# Altium PCB PCB - Rectangular Longer.PcbDoc (part 2 of 2)
Units mm, origin at the board's own origin, x right, y up, seen from the top; angles counter-clockwise.
Board outline 30 x 80 mm, 6 copper layers (Top Layer, Layer 1, Layer 3, Layer 4, Layer 2, Bottom Layer), stack 1.211 mm thick; 158 components, 103 nets, 435 pads, 0 vias.
Unrouted connection lines stored in the file: 282.
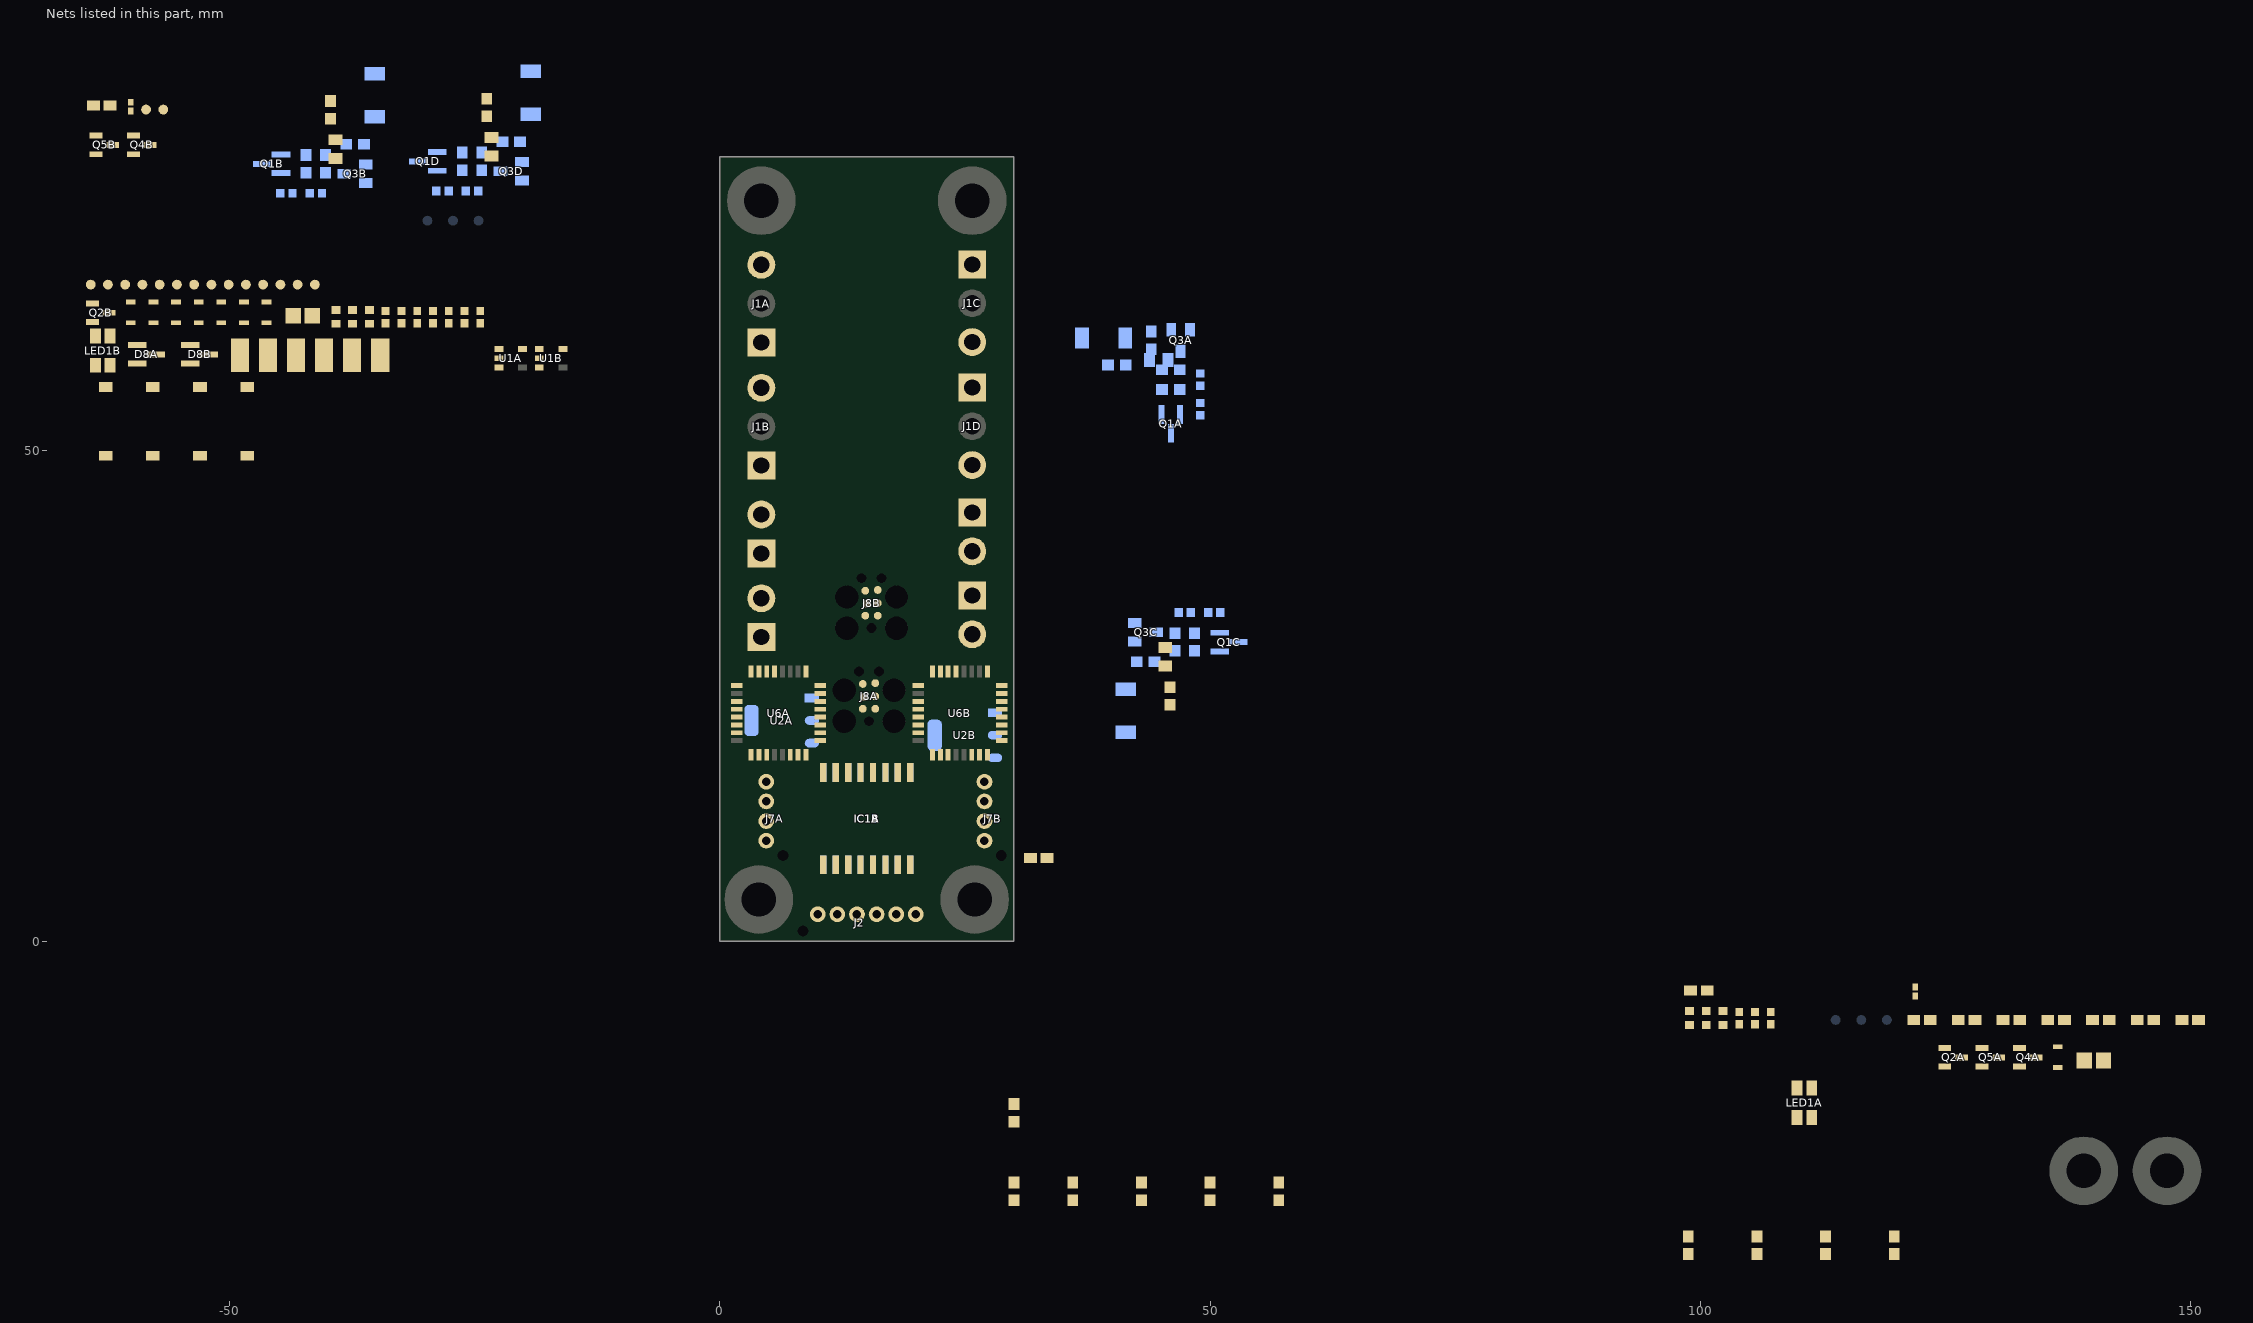
[diagram p2: the nets of this part, all layers, seen from the top]

## Nets (pads, with @x,y where several pads share a name; then routed paths per layer and width w, separated by ;. In a path a pad name is that pad's centre, name@x,y a point inside that pad or via, vN(x,y) a via of type N, cw(c..) or ccw(c..) an arc to the next point about the centre after c; other vN are vias at no path point)
3V3A: C1A.1 C3A.1 C4A.1 C7A.1 C9A.1 C10A.1 C11A.1 IC1A.1 IC1A.5 J7A.1 J8A.1 LED1A.1 R8A.2 R9A.2 R37A.2 U1A.5 U2A.3 U6A.1 U6A.5 U6A.17
3V3B: C1B.1 C3B.1 C4B.1 C7B.1 C9B.1 C10B.1 C11B.1 IC1B.1 IC1B.5 J7B.1 J8B.1 LED1B.1 R8B.2 R9B.2 R37B.2 U1B.5 U2B.3 U6B.1 U6B.5 U6B.17
BOOT0A: R9A.1 SW1A.2 U6A.31
BOOT0B: R9B.1 SW1B.2 U6B.31
GNDA: C1A.2 C1B.2 C2A.2 C2B.2 C3A.2 C3B.2 C4A.2 C4B.2 C7A.2 C7B.2 C8A.2 C8B.2 C9A.2 C9B.2 C10A.2 C10B.2 C11A.2 C11B.2 IC1A.2 IC1A.4 IC1A.7 IC1A.8 IC1B.2 IC1B.4 IC1B.7 IC1B.8 J1A.3 J1B.3 J1C.3 J1D.3 J3A.2 J3B.2 J3C.2 J3D.2 J7A.4 J7B.4 J8A.5 J8B.5 LED2A.1 LED2B.1 LED2C.1 LED2D.1 Q2A.2 Q2B.2 Q3A.2 Q3B.2 Q3C.2 Q3D.2 Q4A.2 Q4B.2 Q5A.2 Q5B.2 R3A.1 R3B.1 R3C.1 R3D.1 R7A.1 R7B.1 R7C.1 R7D.1 R16A.1 R16B.1 R17A.1 R17B.1 R18A.1 R18B.1 SW1A.1 SW1B.1 SW2A.1 SW2B.1 TP1A.1 TP1B.1 TP2A.1 TP2B.1 TP3A.1 TP3B.1 U1A.2 U1B.2 U2A.2 U2A.4 U2B.2 U2B.4 U6A.16 U6A.32 U6B.16 U6B.32
ISO_5VA: C5A.1 C5B.1 C6A.1 C6B.1 IC1A.16 IC1B.16 J2.1
ISO_GNDA: C5A.2 C5B.2 C6A.2 C6B.2 IC1A.9 IC1A.10 IC1A.15 IC1B.9 IC1B.10 IC1B.15 J2.6
LED_BLUEA: Q2A.1 R16A.2 U6A.18
LED_BLUEB: Q2B.1 R16B.2 U6B.18
LED_REDA: Q5A.1 R18A.2 U6A.3
LED_REDB: Q5B.1 R18B.2 U6B.3
LPUART1_RXA: SB2A.1 U6A.9
LPUART1_RXB: SB2B.1 U6B.9
LPUART1_TXA: SB3A.1 U6A.7
LPUART1_TXB: SB3B.1 U6B.7
NetC2A_1: C2A.1 D8A.3 U2A.1
NetC2B_1: C2B.1 D8B.3 U2B.1
NetC8A_1: C8A.1 SW2A.2 U1A.3
NetC8B_1: C8B.1 SW2B.2 U1B.3
NetD1A_1: D1A.1 J1A.1
NetD1B_1: D1B.1 J1B.1
NetD1C_1: D1C.1 J1C.1
NetD1D_1: D1D.1 J1D.1
NetIC1A_3: IC1A.3 SB2A.2
NetIC1A_6: IC1A.6 SB3A.2
NetIC1A_11: IC1A.11 IC1B.11 J2.5
NetIC1A_12: IC1A.12 IC1B.12 J2.4
NetIC1A_13: IC1A.13 IC1B.13 J2.3
NetIC1A_14: IC1A.14 IC1B.14 J2.2
NetIC1B_3: IC1B.3 SB2B.2
NetIC1B_6: IC1B.6 SB3B.2
NetJ3A_1: J3A.1 Q1A.3 R22A.2
NetJ3B_1: J3B.1 Q1B.3 R22B.2
NetJ3C_1: J3C.1 Q1C.3 R22C.2
NetJ3D_1: J3D.1 Q1D.3 R22D.2
NetJ7A_2: J7A.2 SB1A.2
NetJ7A_3: J7A.3 R37A.1 SB4A.2
NetJ7B_2: J7B.2 SB1B.2
NetJ7B_3: J7B.3 R37B.1 SB4B.2
NetJ8A_3: J8A.3 TP10A.1
NetJ8A_6: J8A.6 TP11A.1
NetJ8B_3: J8B.3 TP10B.1
NetJ8B_6: J8B.6 TP11B.1
NetLED1A_2: LED1A.2 R13A.2
NetLED1A_3: LED1A.3 R14A.2
NetLED1A_4: LED1A.4 R15A.2
NetLED1B_2: LED1B.2 R13B.2
NetLED1B_3: LED1B.3 R14B.2
NetLED1B_4: LED1B.4 R15B.2
NetLED2A_2: LED2A.2 R22A.1
NetLED2B_2: LED2B.2 R22B.1
NetLED2C_2: LED2C.2 R22C.1
NetLED2D_2: LED2D.2 R22D.1
NetQ1A_1: Q1A.1 R1A.2 R10A.2
NetQ1B_1: Q1B.1 R1B.2 R10B.2
NetQ1C_1: Q1C.1 R1C.2 R10C.2
NetQ1D_1: Q1D.1 R1D.2 R10D.2
NetQ2A_3: Q2A.3 R13A.1
NetQ2B_3: Q2B.3 R13B.1
NetQ3A_3: Q3A.3 R10A.1
NetQ3B_3: Q3B.3 R10B.1
NetQ3C_3: Q3C.3 R10C.1
NetQ3D_3: Q3D.3 R10D.1
NetQ4A_1: Q4A.1 R17A.2
NetQ4A_3: Q4A.3 R14A.1
NetQ4B_1: Q4B.1 R17B.2
NetQ4B_3: Q4B.3 R14B.1
NetQ5A_3: Q5A.3 R15A.1
NetQ5B_3: Q5B.3 R15B.1
NetTP4A_1: TP4A.1 U6A.6
NetTP4B_1: TP4B.1 U6B.6
NetTP5A_1: TP5A.1 U6A.29
NetTP5B_1: TP5B.1 U6B.29
NetTP6A_1: TP6A.1 U6A.30
NetTP6B_1: TP6B.1 U6B.30
NetTP7A_1: TP7A.1 U6A.21
NetTP7B_1: TP7B.1 U6B.21
NetTP8A_1: TP8A.1 U6A.22
NetTP8B_1: TP8B.1 U6B.22
NetTP9A_1: TP9A.1 U6A.25
NetTP9B_1: TP9B.1 U6B.25
NRSTA: R8A.1 U1A.1 U6A.4
NRSTB: R8B.1 U1B.1 U6B.4
PRIMARY_OUT_EN_1: Q3A.1 R3A.2 U6A.14
PRIMARY_OUT_EN_2: Q3B.1 R3B.2 U6A.15
PRIMARY_VBATT_1: D1A.2 D8A.1 Q1A.2 R1A.1 R6A.2
PRIMARY_VBATT_2: D1B.2 D8A.2 Q1B.2 R1B.1 R6B.2
PRIMARY_VBATT_SENSE_1: R6A.1 R7A.2 U6A.10
PRIMARY_VBATT_SENSE_2: R6B.1 R7B.2 U6A.11
SECONDARY_OUT_EN_1: Q3C.1 R3C.2 U6B.14
SECONDARY_OUT_EN_2: Q3D.1 R3D.2 U6B.15
SECONDARY_VBATT_1: D1C.2 D8B.1 Q1C.2 R1C.1 R6C.2
SECONDARY_VBATT_2: D1D.2 D8B.2 Q1D.2 R1D.1 R6D.2
SECONDARY_VBATT_SENSE_1: R6C.1 R7C.2 U6B.10
SECONDARY_VBATT_SENSE_2: R6D.1 R7D.2 U6B.11
SWCLKA: J8A.4 U6A.24
SWCLKB: J8B.4 U6B.24
SWDIOA: J8A.2 U6A.23
SWDIOB: J8B.2 U6B.23
USART2_RXA: SB4A.1 U6A.20
USART2_RXB: SB4B.1 U6B.20
USART2_TXA: SB1A.1 U6A.19
USART2_TXB: SB1B.1 U6B.19
pads on no net: FID1.0 FID2.0 FID3.0 FID4.0 FID5.0 FID6.0 H1.1 H2.1 H3.1 H4.1 H5.1 H6.1 J1A.2 J1B.2 J1C.2 J1D.2 J2.11 J7A.11 J7B.11 J8A.0 J8B.0 U1A.4 U1B.4 U6A.2 U6A.8 U6A.12 U6A.13 U6A.26 U6A.27 U6A.28 U6B.2 U6B.8 U6B.12 U6B.13 U6B.26 U6B.27 U6B.28

## Silkscreen, mask and mechanical layers (free items; w line width, h text height)
Board:
  the board outline again, w0.5
Top Assembly (Mech5):
  drawing of 71 lines, arcs and shapes, not listed
  text "1" at -251.917,172.192 h3.81
  text "2" at -194.692,172.192 h3.81
  text "3" at -139.241,172.192 h3.81
  text "7" at 102.968,172.192 h3.81
  text "8" at 161.08,172.192 h3.81
  text "9" at 218.305,172.192 h3.81
  text "6" at 43.276,171.952 h3.81
  text "5" at -14.795,171.821 h3.81
  text "10" at 274.643,171.749 h3.81
  text "4" at -74.918,171.305 h3.81
  text "A" at 309.492,146.2 h3.81
  text "A" at -278.414,146.152 h3.81
  text "B" at 309.492,94.775 h3.81
  text "B" at -278.414,94.727 h3.81
  text "C" at 309.802,44.588 h3.81
  text "C" at -278.104,44.54 h3.81
  text "ASSEMBLY DRAWING NOTES: /  / 1. THE PCB ASSEMBLY SHALL BE COMPLIANT WITH THE ROHS2 DIRECTIVE 2011/65/EU. THIS SHALL INCLUDE, AT A MINIMUM, ALL THE CONSTITUENT MATERIALS AND ANY OTHER ADDITIVES THAT MAY BE INCLUDED OR TRANSFERRED INTO THE FINAL PRODUCT DURING THE MANUFACTURING PROCESS. THE SUPPLIER OF THIS PCB ASSEMBLY SHALL BE ABLE TO PROVIDE DOCUMENTATION UPON REQUEST DEMONSTRATING COMPLIANCE TO THE DIRECTIVE. /       / 2. ASSEMBLY SHALL BE ACCEPTABLE AND REJECTABLE AND INSPECTED TO IPC-A-610, CLASS 2. /  / 3. REWORK, REPAIR, OR MODIFICATIONS MUST COMPLY WITH IPC-7711 AND IPC-7721 CLASS 2. /  / 4. EXCEPTIONS TO NOTE 3: LIFTED LAND REPAIR, LAND REPAIR, LIFTED CONDUCTORS, AND PAD REPAIR IS NOT ACCEPTABLE. /  / 5. EACH LOT SHALL HAVE A CERTIFICATE OF COMPLIANCE TO CERTIFY THAT MATERIALS SPECIFIED ON THE BILL OF MATERIALS HAVE BEEN USED AND THAT THE ASSEMBLY HAS BEEN ASSEMBLED IN COMPLIANCE WITH THE AGREED QUALITY PLAN. /  / 6. THE ASSEMBLY SHALL BE LEGIBLY IDENTIFIED USING NON-CONDUCTIVE EPOXY INK OR A NON-CONDUCTIVE PERMANENT LABEL LOCATED IN THE AREA(S) INDICATED. THE IDENTIFIERS SHALL CONSIST OF THE MBI NUMBER (INCLUDING REVISION) AND THE BOARD'S SERIAL NUMBER (TO BE GENERATED BY THE ASSEMBLER). IF THIS ASSEMBLY DRAWING SHOWS THE LOCATION IS OFF THE BOARD, THE LABEL SHOULD BE PLACED ON A TAG THAT IS ATTACHED TO THE BOARD. /  / 7. COMPONENTS WITH PIN ONE DESIGNATOR OR POLARIZATION MARKINGS SHALL BE PLACED AS INDICATED ON THE ASSEMBLY DRAWING. /  / 8. APPROPRIATE ESD PRECAUTIONS SHALL BE USED WHILE BUILDING OR HANDLING THIS ASSEMBLY. /  / 9. COMPONENT LEADS IN PLATED-THROUGH HOLES SHALL BE TRIMMED TO EXTEND NO GREATER THAN 1.8 MM FROM THE PLATING SURFACE." at -240,5 h2
  text "D" at 309.802,-11.484 h3.81
  text "D" at -278.104,-11.532 h3.81
  text "E" at 309.492,-61.361 h3.81
  text "E" at -278.414,-61.409 h3.81
  text "F" at 310.111,-113.096 h3.81
  text "F" at -277.794,-113.144 h3.81
  text "G" at 309.802,-166.071 h3.81
  text "G" at -278.104,-166.119 h3.81
  text "H" at 309.492,-219.045 h3.81
  text "H" at -278.414,-219.093 h3.81
  text "P" at -214.85,-224.15 h2.33
  text "r" at -213.65,-224.15 h2.33
  text "o" at -212.9,-224.15 h2.33
  text "j" at -211.85,-224.15 h2.33
  text "e" at -211.25,-224.15 h2.33
  text "c" at -210.35,-224.15 h2.33
  text "t" at -209.45,-224.15 h2.33
  text "S" at -208.55,-224.15 h2.33
  text "u" at -207.35,-224.15 h2.33
  text "n" at -206.3,-224.15 h2.33
  text "r" at -205.25,-224.15 h2.33
  text "i" at -204.5,-224.15 h2.33
  text "d" at -203.9,-224.15 h2.33
  text "e" at -203,-224.15 h2.33
  text "Copyright" at 141.3,-224.424 h2.5
  text ".a_CopyrightDate" at 151.8,-224.424 h2.5
  text "Drawing No:" at 173.3,-224.924 h3
  text ".a_AssemDwgNo" at 188.8,-224.924 h4
  text "Title:" at 238.3,-224.924 h3
  text ".a_Title" at 245.3,-224.924 h4
  text "T" at -214.25,-226.4 h2.33
  text "h" at -213.05,-226.4 h2.33
  text "e" at -212,-226.4 h2.33
  text "D" at -210.65,-226.4 h2.33
  text "i" at -209.15,-226.4 h2.33
  text "a" at -208.55,-226.4 h2.33
  text "m" at -207.65,-226.4 h2.33
  text "o" at -206,-226.4 h2.33
  text "n" at -204.95,-226.4 h2.33
  text "d" at -203.9,-226.4 h2.33
  text "UNLESS OTHERWISE SPECIFIED / DIMENSONS AND TOLLERANCES ARE IN / mm AND APPLY TO FINISHED PART" at 85.293,-228.599 h1.52
  text "3" at -216.5,-228.8 h2.33
  text "2" at -215.45,-228.8 h2.33
  text "L" at -213.95,-228.8 h2.33
  text "e" at -212.75,-228.8 h2.33
  text "a" at -211.85,-228.8 h2.33
  text "v" at -210.95,-228.8 h2.33
  text "y" at -209.9,-228.8 h2.33
  text "g" at -208.85,-228.8 h2.33
  text "r" at -207.8,-228.8 h2.33
  text "e" at -207.05,-228.8 h2.33
  text "a" at -206.15,-228.8 h2.33
  text "v" at -205.25,-228.8 h2.33
  text "e" at -204.2,-228.8 h2.33
  text "R" at -202.85,-228.8 h2.33
  text "d" at -201.5,-228.8 h2.33
  text "Altium Designer" at 141.3,-229.424 h2.5
  text ".a_AltiumVer" at 157.8,-229.424 h2.5
  text "Changed by:" at 173.3,-229.424 h2.5
  text ".a_PcbRevAuthor" at 186.3,-229.424 h3
  text "Change Date:" at 208.8,-229.424 h2.5
  text ".a_PcbRevDate" at 222.3,-229.424 h2.5
  text "Top Assembly" at 238.2,-229.949 h4
  text "B" at -217.1,-231.05 h2.33
  text "r" at -215.75,-231.05 h2.33
  text "o" at -215,-231.05 h2.33
  text "o" at -213.95,-231.05 h2.33
  text "m" at -212.9,-231.05 h2.33
  text "h" at -211.25,-231.05 h2.33
  text "a" at -210.2,-231.05 h2.33
  text "l" at -209.3,-231.05 h2.33
  text "l" at -208.7,-231.05 h2.33
  text "," at -208.1,-231.05 h2.33
  text "S" at -207.2,-231.05 h2.33
  text "h" at -206,-231.05 h2.33
  text "e" at -204.95,-231.05 h2.33
  text "f" at -204.05,-231.05 h2.33
  text "f" at -203.3,-231.05 h2.33
  text "i" at -202.55,-231.05 h2.33
  text "e" at -201.95,-231.05 h2.33
  text "l" at -201.2,-231.05 h2.33
  text "d" at -200.75,-231.05 h2.33
  text "TOLLERANCES ON:" at 98.993,-231.299 h1.52
  text "U" at -215.45,-233.3 h2.33
  text "n" at -213.95,-233.3 h2.33
  text "i" at -212.9,-233.3 h2.33
  text "t" at -212.3,-233.3 h2.33
  text "e" at -211.7,-233.3 h2.33
  text "d" at -210.8,-233.3 h2.33
  text "K" at -209.45,-233.3 h2.33
  text "i" at -207.95,-233.3 h2.33
  text "n" at -207.35,-233.3 h2.33
  text "g" at -206.3,-233.3 h2.33
  text "d" at -205.25,-233.3 h2.33
  text "o" at -204.2,-233.3 h2.33
  text "m" at -203.15,-233.3 h2.33
  text "Size A2" at 141.3,-234.424 h2.5
  text "Change Reason:" at 173.3,-234.424 h2.5
  text ".a_PcbRevReason" at 189.8,-234.424 h2.5
  text "Sheet 1 of 2" at 208.8,-234.424 h2.5
  text "Variant: '.a_Variant'" at 238,-235 h4
  text "S" at -211.7,-235.55 h2.33
  text "3" at -210.5,-235.55 h2.33
  text "7" at -209,-235.55 h2.33
  text "R" at -207.95,-235.55 h2.33
  text "D" at -206.6,-235.55 h2.33
  text "1 PLACE DEC. / +/- 0.15" at 80.293,-236.199 h1.52
  text "ANGLES / +/- 0.5 DEG." at 121.593,-236.199 h1.52
  text "2 PLACE DEC. / +/- 0.05" at 100.993,-236.299 h1.52
  text "THIS DRAWING REMAINS THE PROPERTY OF PROJECT SUNRIDE. / COPYRIGHT FOR ALL PURPOSES IS VESTED IN PROJECT SUNRIDE. / THE REPRODUCTION OF THIS DRAWING IN WHOLE OR IN PART IS PROHIBITED WITHOUT EXPRESS CONSENT IN WRITING. THIS DESIGN IS OFFERED FOR USE ONLY WITH EQUIPMENT MANUFACTURED OR SPECIFICALLY RECOMMENDED BY PROJECT SUNRIDE. RIGHTS ARE RESERVED TO MAKE A CHARGE FOR THE USE OF THIS DESIGN OR ANY PART THEREOF AND SUCH RIGHT SHALL SUBSIST UNLESS AND UNTIL THE SAME SHALL BE EXPRESSLY WAIVED IN WRITING. ACCEPTANCE OF THIS DRAWING WILL BE CONSTRUED AS AN ACCEPTANCE OF THESE CONDITIONS." at -174.207,-238.999 h1.52
  text "1" at -251.893,-240.91 h3.81
  text "2" at -194.668,-240.91 h3.81
  text "3" at -139.217,-240.91 h3.81
  text "7" at 102.992,-240.91 h3.81
  text "8" at 161.104,-240.91 h3.81
  text "9" at 218.329,-240.91 h3.81
  text "6" at 43.3,-241.15 h3.81
  text "5" at -14.771,-241.282 h3.81
  text "10" at 274.667,-241.353 h3.81
  text "4" at -74.894,-241.797 h3.81
Bottom Assembly:
  drawing of 71 lines, arcs and shapes, not listed
  text "9" at -184.307,172.194 h3.81
  text "8" at -127.082,172.194 h3.81
  text "7" at -68.97,172.194 h3.81
  text "3" at 173.239,172.194 h3.81
  text "2" at 228.69,172.194 h3.81
  text "1" at 285.915,172.194 h3.81
  text "6" at -9.279,171.954 h3.81
  text "5" at 48.792,171.823 h3.81
  text "10" at -240.645,171.751 h3.81
  text "4" at 108.916,171.307 h3.81
  text "A" at -275.494,146.202 h3.81
  text "A" at 312.412,146.154 h3.81
  text "B" at -275.494,94.777 h3.81
  text "B" at 312.412,94.729 h3.81
  text "C" at -275.804,44.59 h3.81
  text "C" at 312.102,44.542 h3.81
  text "ASSEMBLY DRAWING NOTES: /  / 1. THE PCB ASSEMBLY SHALL BE COMPLIANT WITH THE ROHS2 DIRECTIVE 2011/65/EU. THIS SHALL INCLUDE, AT A MINIMUM, ALL THE CONSTITUENT MATERIALS AND ANY OTHER ADDITIVES THAT MAY BE INCLUDED OR TRANSFERRED INTO THE FINAL PRODUCT DURING THE MANUFACTURING PROCESS. THE SUPPLIER OF THIS PCB ASSEMBLY SHALL BE ABLE TO PROVIDE DOCUMENTATION UPON REQUEST DEMONSTRATING COMPLIANCE TO THE DIRECTIVE. /       / 2. ASSEMBLY SHALL BE ACCEPTABLE AND REJECTABLE AND INSPECTED TO IPC-A-610, CLASS 2. /  / 3. REWORK, REPAIR, OR MODIFICATIONS MUST COMPLY WITH IPC-7711 AND IPC-7721 CLASS 2. /  / 4. EXCEPTIONS TO NOTE 3: LIFTED LAND REPAIR, LAND REPAIR, LIFTED CONDUCTORS, AND PAD REPAIR IS NOT ACCEPTABLE. /  / 5. EACH LOT SHALL HAVE A CERTIFICATE OF COMPLIANCE TO CERTIFY THAT MATERIALS SPECIFIED ON THE BILL OF MATERIALS HAVE BEEN USED AND THAT THE ASSEMBLY HAS BEEN ASSEMBLED IN COMPLIANCE WITH THE AGREED QUALITY PLAN. /  / 6. THE ASSEMBLY SHALL BE LEGIBLY IDENTIFIED USING NON-CONDUCTIVE EPOXY INK OR A NON-CONDUCTIVE PERMANENT LABEL LOCATED IN THE AREA(S) INDICATED. THE IDENTIFIERS SHALL CONSIST OF THE MBI NUMBER (INCLUDING REVISION) AND THE BOARD'S SERIAL NUMBER (TO BE GENERATED BY THE ASSEMBLER). IF THIS ASSEMBLY DRAWING SHOWS THE LOCATION IS OFF THE BOARD, THE LABEL SHOULD BE PLACED ON A TAG THAT IS ATTACHED TO THE BOARD. /  / 7. COMPONENTS WITH PIN ONE DESIGNATOR OR POLARIZATION MARKINGS SHALL BE PLACED AS INDICATED ON THE ASSEMBLY DRAWING. /  / 8. APPROPRIATE ESD PRECAUTIONS SHALL BE USED WHILE BUILDING OR HANDLING THIS ASSEMBLY. /  / 9. COMPONENT LEADS IN PLATED-THROUGH HOLES SHALL BE TRIMMED TO EXTEND NO GREATER THAN 1.8 MM FROM THE PLATING SURFACE." at 273.998,5.002 h2
  text "D" at -275.804,-11.482 h3.81
  text "D" at 312.102,-11.53 h3.81
  text "E" at -275.494,-61.359 h3.81
  text "E" at 312.412,-61.407 h3.81
  text "Place Serial Number QR code label where indicated. / QR code format = xxxxxx-yyyyyy / Where xxxxxx is the works order number, and yyyyyy is an incrementing item number starting from 1. / Text below QR code should show the QR code data, along with the Master Build Instruction number and revision." at 116.5,-82.1 h2
  text "F" at -276.114,-113.094 h3.81
  text "F" at 311.792,-113.142 h3.81
  text "G" at -275.804,-166.069 h3.81
  text "G" at 312.102,-166.117 h3.81
  text "H" at -275.494,-219.043 h3.81
  text "H" at 312.412,-219.091 h3.81
  text "e" at 239,-224.15 h2.33
  text "d" at 239.9,-224.15 h2.33
  text "i" at 240.5,-224.15 h2.33
  text "r" at 241.25,-224.15 h2.33
  text "n" at 242.3,-224.15 h2.33
  text "u" at 243.35,-224.15 h2.33
  text "S" at 244.55,-224.15 h2.33
  text "t" at 245.45,-224.15 h2.33
  text "c" at 246.35,-224.15 h2.33
  text "e" at 247.25,-224.15 h2.33
  text "j" at 247.85,-224.15 h2.33
  text "o" at 248.9,-224.15 h2.33
  text "r" at 249.65,-224.15 h2.33
  text "P" at 250.85,-224.15 h2.33
  text ".a_CopyrightDate" at -117.802,-224.422 h2.5
  text "Copyright" at -107.302,-224.422 h2.5
  text ".a_Title" at -211.302,-224.922 h4
  text "Title:" at -204.302,-224.922 h3
  text ".a_AssemDwgNo" at -154.802,-224.922 h4
  text "Drawing No:" at -139.302,-224.922 h3
  text "d" at 239.9,-226.4 h2.33
  text "n" at 240.95,-226.4 h2.33
  text "o" at 242,-226.4 h2.33
  text "m" at 243.65,-226.4 h2.33
  text "a" at 244.55,-226.4 h2.33
  text "i" at 245.15,-226.4 h2.33
  text "D" at 246.65,-226.4 h2.33
  text "e" at 248,-226.4 h2.33
  text "h" at 249.05,-226.4 h2.33
  text "T" at 250.25,-226.4 h2.33
  text "UNLESS OTHERWISE SPECIFIED / DIMENSONS AND TOLLERANCES ARE IN / mm AND APPLY TO FINISHED PART" at -51.296,-228.597 h1.52
  text "d" at 237.5,-228.8 h2.33
  text "R" at 238.85,-228.8 h2.33
  text "e" at 240.2,-228.8 h2.33
  text "v" at 241.25,-228.8 h2.33
  text "a" at 242.15,-228.8 h2.33
  text "e" at 243.05,-228.8 h2.33
  text "r" at 243.8,-228.8 h2.33
  text "g" at 244.85,-228.8 h2.33
  text "y" at 245.9,-228.8 h2.33
  text "v" at 246.95,-228.8 h2.33
  text "a" at 247.85,-228.8 h2.33
  text "e" at 248.75,-228.8 h2.33
  text "L" at 249.95,-228.8 h2.33
  text "2" at 251.45,-228.8 h2.33
  text "3" at 252.5,-228.8 h2.33
  text ".a_PcbRevDate" at -188.302,-229.422 h2.5
  text "Change Date:" at -174.802,-229.422 h2.5
  text ".a_PcbRevAuthor" at -152.302,-229.422 h3
  text "Changed by:" at -139.302,-229.422 h2.5
  text ".a_AltiumVer" at -123.802,-229.422 h2.5
  text "Altium Designer" at -107.302,-229.422 h2.5
  text "Bottom Assembly" at -204.202,-229.947 h4
  text "d" at 236.75,-231.05 h2.33
  text "l" at 237.2,-231.05 h2.33
  text "e" at 237.95,-231.05 h2.33
  text "i" at 238.55,-231.05 h2.33
  text "f" at 239.3,-231.05 h2.33
  text "f" at 240.05,-231.05 h2.33
  text "e" at 240.95,-231.05 h2.33
  text "h" at 242,-231.05 h2.33
  text "S" at 243.2,-231.05 h2.33
  text "," at 244.1,-231.05 h2.33
  text "l" at 244.7,-231.05 h2.33
  text "l" at 245.3,-231.05 h2.33
  text "a" at 246.2,-231.05 h2.33
  text "h" at 247.25,-231.05 h2.33
  text "m" at 248.9,-231.05 h2.33
  text "o" at 249.95,-231.05 h2.33
  text "o" at 251,-231.05 h2.33
  text "r" at 251.75,-231.05 h2.33
  text "B" at 253.1,-231.05 h2.33
  text "TOLLERANCES ON:" at -64.995,-231.297 h1.52
  text "m" at 239.15,-233.3 h2.33
  text "o" at 240.2,-233.3 h2.33
  text "d" at 241.25,-233.3 h2.33
  text "g" at 242.3,-233.3 h2.33
  text "n" at 243.35,-233.3 h2.33
  text "i" at 243.95,-233.3 h2.33
  text "K" at 245.45,-233.3 h2.33
  text "d" at 246.8,-233.3 h2.33
  text "e" at 247.7,-233.3 h2.33
  text "t" at 248.3,-233.3 h2.33
  text "i" at 248.9,-233.3 h2.33
  text "n" at 249.95,-233.3 h2.33
  text "U" at 251.45,-233.3 h2.33
  text "Sheet 2 of 2" at -174.802,-234.422 h2.5
  text ".a_PcbRevReason" at -155.802,-234.422 h2.5
  text "Change Reason:" at -139.302,-234.422 h2.5
  text "Size A2" at -107.302,-234.422 h2.5
  text "Variant: '.a_Variant'" at -204.002,-234.998 h4
  text "D" at 242.6,-235.55 h2.33
  text "R" at 243.95,-235.55 h2.33
  text "7" at 245,-235.55 h2.33
  text "3" at 246.5,-235.55 h2.33
  text "S" at 247.7,-235.55 h2.33
  text "ANGLES / +/- 0.5 DEG." at -87.595,-236.197 h1.52
  text "1 PLACE DEC. / +/- 0.15" at -46.296,-236.197 h1.52
  text "2 PLACE DEC. / +/- 0.05" at -66.995,-236.297 h1.52
  text "THIS DRAWING REMAINS THE PROPERTY OF PROJECT SUNRIDE. / COPYRIGHT FOR ALL PURPOSES IS VESTED IN PROJECT SUNRIDE. / THE REPRODUCTION OF THIS DRAWING IN WHOLE OR IN PART IS PROHIBITED WITHOUT EXPRESS CONSENT IN WRITING. THIS DESIGN IS OFFERED FOR USE ONLY WITH EQUIPMENT MANUFACTURED OR SPECIFICALLY RECOMMENDED BY PROJECT SUNRIDE. RIGHTS ARE RESERVED TO MAKE A CHARGE FOR THE USE OF THIS DESIGN OR ANY PART THEREOF AND SUCH RIGHT SHALL SUBSIST UNLESS AND UNTIL THE SAME SHALL BE EXPRESSLY WAIVED IN WRITING. ACCEPTANCE OF THIS DRAWING WILL BE CONSTRUED AS AN ACCEPTANCE OF THESE CONDITIONS." at 208.205,-238.997 h1.52
  text "9" at -184.331,-240.908 h3.81
  text "8" at -127.106,-240.908 h3.81
  text "7" at -68.994,-240.908 h3.81
  text "3" at 173.215,-240.908 h3.81
  text "2" at 228.666,-240.908 h3.81
  text "1" at 285.891,-240.908 h3.81
  text "6" at -9.302,-241.148 h3.81
  text "5" at 48.769,-241.28 h3.81
  text "10" at -240.669,-241.351 h3.81
  text "4" at 108.892,-241.795 h3.81
Drill Drawing:
  drawing of 89 lines, arcs and shapes, not listed
  text "1" at -252.01,172.191 h3.81
  text "2" at -194.785,172.191 h3.81
  text "3" at -139.334,172.191 h3.81
  text "7" at 102.875,172.191 h3.81
  text "8" at 160.987,172.191 h3.81
  text "9" at 218.212,172.191 h3.81
  text "6" at 43.183,171.951 h3.81
  text "5" at -14.888,171.819 h3.81
  text "10" at 274.55,171.748 h3.81
  text "4" at -75.011,171.304 h3.81
  text "A" at 309.399,146.199 h3.81
  text "A" at -278.507,146.151 h3.81
  text "B" at 309.399,94.773 h3.81
  text "B" at -278.507,94.725 h3.81
  text "C" at 309.708,44.587 h3.81
  text "C" at -278.197,44.539 h3.81
  text "D" at 309.708,-11.486 h3.81
  text "D" at -278.197,-11.534 h3.81
  text "E" at 309.399,-61.362 h3.81
  text "E" at -278.507,-61.41 h3.81
  text "PLEASE PLACE THE ELECTRICAL CHECK MARK (BBT) IN THIS AREA ON THE BOTTOM SILKSCREEN LAYER." at -91.8,-61.9 h2
  text "1.      ROHS / THE PCB SHALL BE COMPLIANT WITH THE EU ROHS2 DIRECTIVE 2011/65/EU. THIS SHALL INCLUDE, AT A MINIMUM, ALL THE CONSTITUENT MATERIALS AND ANY OTHER ADDITIVES THAT MAY BE INCLUDED OR TRANSFERRED INTO THE FINAL PRODUCT DURING THE MANUFACTURING PROCESS. THE SUPPLIER OF THIS PCB SHALL BE ABLE TO PROVIDE DOCUMENTATION UPON REQUEST DEMONSTRATING COMPLIANCE TO THE DIRECTIVE. /       / 2.      FLAMMABILITY / THE PCB MATERIALS AND CONSTRUCTION MUST MEET UL94V-0. /  / 3.      MATERIALS / SEE THE BOARD STACKUP TABLE FOR DETAILS.  / FINISHED PCB THICKNESS TO BE WITHIN +/- 10% OF THE TOTAL OF THE STACKUP TABLE. /  / 4.      IMPEDANCE CONTROL / SEE TABLE. /  / 5.      PLATING / COPPER THICKNESSES STATED IN STACKUP TABLE ARE FINISHED PLATED WEIGHTS. / HOLES TO BE PLATED THRU 0.025 MM MINIMUM COPPER. ALL VIAS TO BE RESIN FILLED & PLATED SHUT. /  / 6.      LINE THICKNESS / FINISHED LINE THICKNESS TO BE WITHIN +/- 10% OF GERBER DATA. /  / 7.      DRILLING / SEE DRILL TABLE. SIZES SHOWN ARE FINISHED HOLE SIZES. / MINIMUM ANNULAR RING REQUIREMENT IS 0.05 MM. / DRILL HOLE TANGENCY IS ACCEPTABLE BUT HOLE BREAK OUT SHALL NOT BE ACCEPTABLE. / HOLE LOCATION AND TOLERANCES ARE TO BE +/- 0.076 MM FROM DATUM (0.0-0.0). /  / 8.      QUALITY / BOARDS SHALL BE ACCEPTABLE AND REJECTABLE PER IPC-A-600 CLASS 2. /  / 9.      SOLDER MASK / CONSTRUCTION TO BE SOLDERMASK OVER BARE COPPER (SMOBC), USING LIQUID PHOTO-IMAGEABLE (LPI) SOLDERMASK TO MEET QUALIFICATIONS OF IPC-SM-840. / SOLDER MASK TO BE GREEN UNLESS OTHERWISE SPECIFIED ON PO. /  / 10.     SILKSCREEN LEGEND / WHITE. /  / 11.     FINISH / IMMERSION GOLD OVER ELECTROLESS NICKEL (ENIG). / COVERAGE AND SOLDERABILITY SHALL MEET IPC-4552. /  / 12.     MARKING / UL LOGO, UL94 V-0 TEXT, MANUFACTURER CODE AND DATE LEGEND TO BE ADDED IN POSITION INDICATED. /  / 13.     ROUTING / PCB WILL HAVE ROUTED EDGE; V-SCORING NOT ALLOWED.  / MINIMUM ROUTING RADIUS TO BE 0.75 MM. / BOARD ROUTING TOLERANCE TO BE +/- 0.2 MM. /  / 14.     ELECTRICAL TESTING / BARE BOARDS SHALL BE 100% ELECTRICAL TESTED FOR RESISTANCE AT 100 VOLTS MINIMUM, AND FOR AND CONTINUITY USING GERBER GENERATED NET LIST DATA.  / “BBT” (BARE BOARD TESTED) TO BE ADDED BY THE MANUFACTURER IN AREA INDICATED TO CERTIFY THAT THE BOARDS HAVE BEEN TESTED. /  / 15.     PACKAGING / BOARD TO BE VACUUM PACKED, SHIPPED AND IDENTIFIED WITH PART NUMBER, REVISION, AND DATE CODE MARKED ON THE PACKAGING. /  / 16.     PANELISATION / PANEL SIZE, BOARDS PER PANEL AND TOOLING RAILS / HOLES TO BE SPECIFIED BY PCB ASSEMBLER ON PURCHASE ORDER. /  / 17.     SOLDER PASTE STENCIL DATA / PLEASE SEND BACK TO US THE STEP AND REPEATED DATA FOR THE SOLDER PASTE STENCIL." at -260.1,-74 h2
  text "PLEASE PLACE THE UL LOGO, ETC. IN THIS AREA ON THE BOTTOM SILKSCREEN LAYER" at -91.8,-79.4 h2
  text "ENSURE BOARD CUTOUT IS INCORPORATED - SEE PANEL ROUTING LAYER" at 38.25,-92.425 h2
  text "Controlled Impedance Table" at 214.9,-95.9 h4
  text "Ref Layer" at 208.7,-100.8 h4
  text "Layer" at 175.9,-100.9 h4
  text "Width" at 186.9,-100.9 h4
  text "Gap" at 198.9,-100.9 h4
  text "Impedance" at 226.9,-100.9 h4
  text "Tollerance" at 246.9,-100.9 h4
  text "Dielectric Const" at 265.9,-100.9 h4
  text "1" at 179,-105.4 h4
  text "0.13" at 197.6,-105.6 h4
  text "2" at 214.3,-105.6 h4
  text "0.2" at 187,-105.7 h4
  text "90R Diff" at 229.1,-105.9 h4
  text "10%" at 251.9,-105.9 h4
  text "4" at 275.9,-105.9 h4
  text "1" at 179.1,-110.3 h4
  text "10%" at 251.864,-110.442 h4
  text "2" at 214.4,-110.5 h4
  text "50R" at 228.821,-110.521 h4
  text "-" at 197.6,-110.7 h4
  text "0.284" at 187,-110.8 h4
  text "4" at 275.9,-111 h4
  text "F" at 310.018,-113.097 h3.81
  text "F" at -277.888,-113.145 h3.81
  text "LAYER STACK TABLE FOR FINISHED BOARD THICKNESSES" at 177.7,-131 h2.5
  text "G" at 309.708,-166.072 h3.81
  text "G" at -278.197,-166.12 h3.81
  text "H" at 309.399,-219.046 h3.81
  text "H" at -278.507,-219.094 h3.81
  text "P" at -213.85,-224.15 h2.33
  text "r" at -212.65,-224.15 h2.33
  text "o" at -211.9,-224.15 h2.33
  text "j" at -210.85,-224.15 h2.33
  text "e" at -210.25,-224.15 h2.33
  text "c" at -209.35,-224.15 h2.33
  text "t" at -208.45,-224.15 h2.33
  text "S" at -207.55,-224.15 h2.33
  text "u" at -206.35,-224.15 h2.33
  text "n" at -205.3,-224.15 h2.33
  text "r" at -204.25,-224.15 h2.33
  text "i" at -203.5,-224.15 h2.33
  text "d" at -202.9,-224.15 h2.33
  text "e" at -202,-224.15 h2.33
  text "Copyright" at 141.207,-224.426 h2.5
  text ".a_CopyrightDate" at 151.707,-224.426 h2.5
  text "Drawing No:" at 173.207,-224.926 h3
  text ".a_PcbPartNo" at 188.707,-224.926 h4
  text "Title:" at 238.207,-224.926 h3
  text ".a_Title" at 245.207,-224.926 h4
  text "T" at -213.25,-226.4 h2.33
  text "h" at -212.05,-226.4 h2.33
  text "e" at -211,-226.4 h2.33
  text "D" at -209.65,-226.4 h2.33
  text "i" at -208.15,-226.4 h2.33
  text "a" at -207.55,-226.4 h2.33
  text "m" at -206.65,-226.4 h2.33
  text "o" at -205,-226.4 h2.33
  text "n" at -203.95,-226.4 h2.33
  text "d" at -202.9,-226.4 h2.33
  text "UNLESS OTHERWISE SPECIFIED / DIMENSONS AND TOLLERANCES ARE IN / mm AND APPLY TO FINISHED PART" at 85.2,-228.6 h1.52
  text "3" at -215.5,-228.8 h2.33
  text "2" at -214.45,-228.8 h2.33
  text "L" at -212.95,-228.8 h2.33
  text "e" at -211.75,-228.8 h2.33
  text "a" at -210.85,-228.8 h2.33
  text "v" at -209.95,-228.8 h2.33
  text "y" at -208.9,-228.8 h2.33
  text "g" at -207.85,-228.8 h2.33
  text "r" at -206.8,-228.8 h2.33
  text "e" at -206.05,-228.8 h2.33
  text "a" at -205.15,-228.8 h2.33
  text "v" at -204.25,-228.8 h2.33
  text "e" at -203.2,-228.8 h2.33
  text "R" at -201.85,-228.8 h2.33
  text "d" at -200.5,-228.8 h2.33
  text "Altium Designer" at 141.207,-229.426 h2.5
  text ".a_AltiumVer" at 157.707,-229.426 h2.5
  text "Changed by:" at 173.207,-229.426 h2.5
  text ".a_PcbRevAuthor" at 186.207,-229.426 h3
  text "Change Date:" at 208.707,-229.426 h2.5
  text ".a_PcbRevDate" at 222.207,-229.426 h2.5
  text "Drill Drawing" at 238.107,-229.951 h4
  text "B" at -216.1,-231.05 h2.33
  text "r" at -214.75,-231.05 h2.33
  text "o" at -214,-231.05 h2.33
  text "o" at -212.95,-231.05 h2.33
  text "m" at -211.9,-231.05 h2.33
  text "h" at -210.25,-231.05 h2.33
  text "a" at -209.2,-231.05 h2.33
  text "l" at -208.3,-231.05 h2.33
  text "l" at -207.7,-231.05 h2.33
  text "," at -207.1,-231.05 h2.33
  text "S" at -206.2,-231.05 h2.33
  text "h" at -205,-231.05 h2.33
  text "e" at -203.95,-231.05 h2.33
  text "f" at -203.05,-231.05 h2.33
  text "f" at -202.3,-231.05 h2.33
  text "i" at -201.55,-231.05 h2.33
  text "e" at -200.95,-231.05 h2.33
  text "l" at -200.2,-231.05 h2.33
  text "d" at -199.75,-231.05 h2.33
  text "TOLLERANCES ON:" at 98.9,-231.3 h1.52
  text "U" at -214.45,-233.3 h2.33
  text "n" at -212.95,-233.3 h2.33
  text "i" at -211.9,-233.3 h2.33
  text "t" at -211.3,-233.3 h2.33
  text "e" at -210.7,-233.3 h2.33
  text "d" at -209.8,-233.3 h2.33
  text "K" at -208.45,-233.3 h2.33
  text "i" at -206.95,-233.3 h2.33
  text "n" at -206.35,-233.3 h2.33
  text "g" at -205.3,-233.3 h2.33
  text "d" at -204.25,-233.3 h2.33
  text "o" at -203.2,-233.3 h2.33
  text "m" at -202.15,-233.3 h2.33
  text "Size A2" at 141.207,-234.426 h2.5
  text "Change Reason:" at 173.207,-234.426 h2.5
  text ".a_PcbRevReason" at 189.707,-234.426 h2.5
  text "Sheet 1 of 1" at 208.707,-234.426 h2.5
  text "S" at -210.7,-235.55 h2.33
  text "3" at -209.5,-235.55 h2.33
  text "7" at -208,-235.55 h2.33
  text "R" at -206.95,-235.55 h2.33
  text "D" at -205.6,-235.55 h2.33
  text "1 PLACE DEC. / +/- 0.15" at 80.2,-236.2 h1.52
  text "ANGLES / +/- 0.5 DEG." at 121.5,-236.2 h1.52
  text "2 PLACE DEC. / +/- 0.05" at 100.9,-236.3 h1.52
  text "THIS DRAWING REMAINS THE PROPERTY OF PROJECT SUNRIDE. / COPYRIGHT FOR ALL PURPOSES IS VESTED IN PROJECT SUNRIDE. / THE REPRODUCTION OF THIS DRAWING IN WHOLE OR IN PART IS PROHIBITED WITHOUT EXPRESS CONSENT IN WRITING. THIS DESIGN IS OFFERED FOR USE ONLY WITH EQUIPMENT MANUFACTURED OR SPECIFICALLY RECOMMENDED BY PROJECT SUNRIDE. RIGHTS ARE RESERVED TO MAKE A CHARGE FOR THE USE OF THIS DESIGN OR ANY PART THEREOF AND SUCH RIGHT SHALL SUBSIST UNLESS AND UNTIL THE SAME SHALL BE EXPRESSLY WAIVED IN WRITING. ACCEPTANCE OF THIS DRAWING WILL BE CONSTRUED AS AN ACCEPTANCE OF THESE CONDITIONS." at -174.3,-239 h1.52
  text "1" at -251.987,-240.911 h3.81
  text "2" at -194.762,-240.911 h3.81
  text "3" at -139.311,-240.911 h3.81
  text "7" at 102.898,-240.911 h3.81
  text "8" at 161.01,-240.911 h3.81
  text "9" at 218.235,-240.911 h3.81
  text "6" at 43.207,-241.152 h3.81
  text "5" at -14.864,-241.283 h3.81
  text "10" at 274.573,-241.354 h3.81
  text "4" at -74.988,-241.798 h3.81

## Text inside footprints (layer, text, board x,y; h text height)
J1A: Top Overlay "1" at 4.55,58.34 h0.7 r90; Top Overlay "3" at 4.55,71.34 h0.7 r90
J1B: Top Overlay "1" at 4.55,45.8 h0.7 r90; Top Overlay "3" at 4.55,58.8 h0.7 r90
J1C: Top Overlay "1" at 25.45,71.7 h0.7 r270; Top Overlay "3" at 25.45,58.7 h0.7 r270
J1D: Top Overlay "1" at 25.45,59.16 h0.7 r270; Top Overlay "3" at 25.45,46.16 h0.7 r270
J2: Top Overlay "6" at 22.8,3.15 h0.7 r180; Top Overlay "1" at 7.5,3.15 h0.7 r180
J3A: Top Overlay "2" at 4.55,37.3 h0.7 r90; Top Overlay "1" at 4.55,28.3 h0.7 r90
J3B: Top Overlay "1" at 4.55,36.84 h0.7 r90; Top Overlay "2" at 4.55,45.84 h0.7 r90
J3C: Top Overlay "1" at 25.45,37.95 h0.7 r270; Top Overlay "2" at 25.45,28.95 h0.7 r270
J3D: Top Overlay "1" at 25.45,46.41 h0.7 r270; Top Overlay "2" at 25.45,37.41 h0.7 r270
J7A: Top Overlay "4" at 4.35,19.05 h0.7 r270; Top Overlay "1" at 4.35,7.85 h0.7 r270
J7B: Top Overlay "1" at 26.6,7.85 h0.7 r270; Top Overlay "4" at 26.6,19.05 h0.7 r270